# Altium PCB drv8303_brd.PcbDoc
Units mm, origin at the board's own origin, x right, y up, seen from the top; angles counter-clockwise.
Board outline 60 x 68 mm, 2 copper layers (Top Layer, Bottom Layer); 83 components, 66 nets, 348 pads, 194 vias.
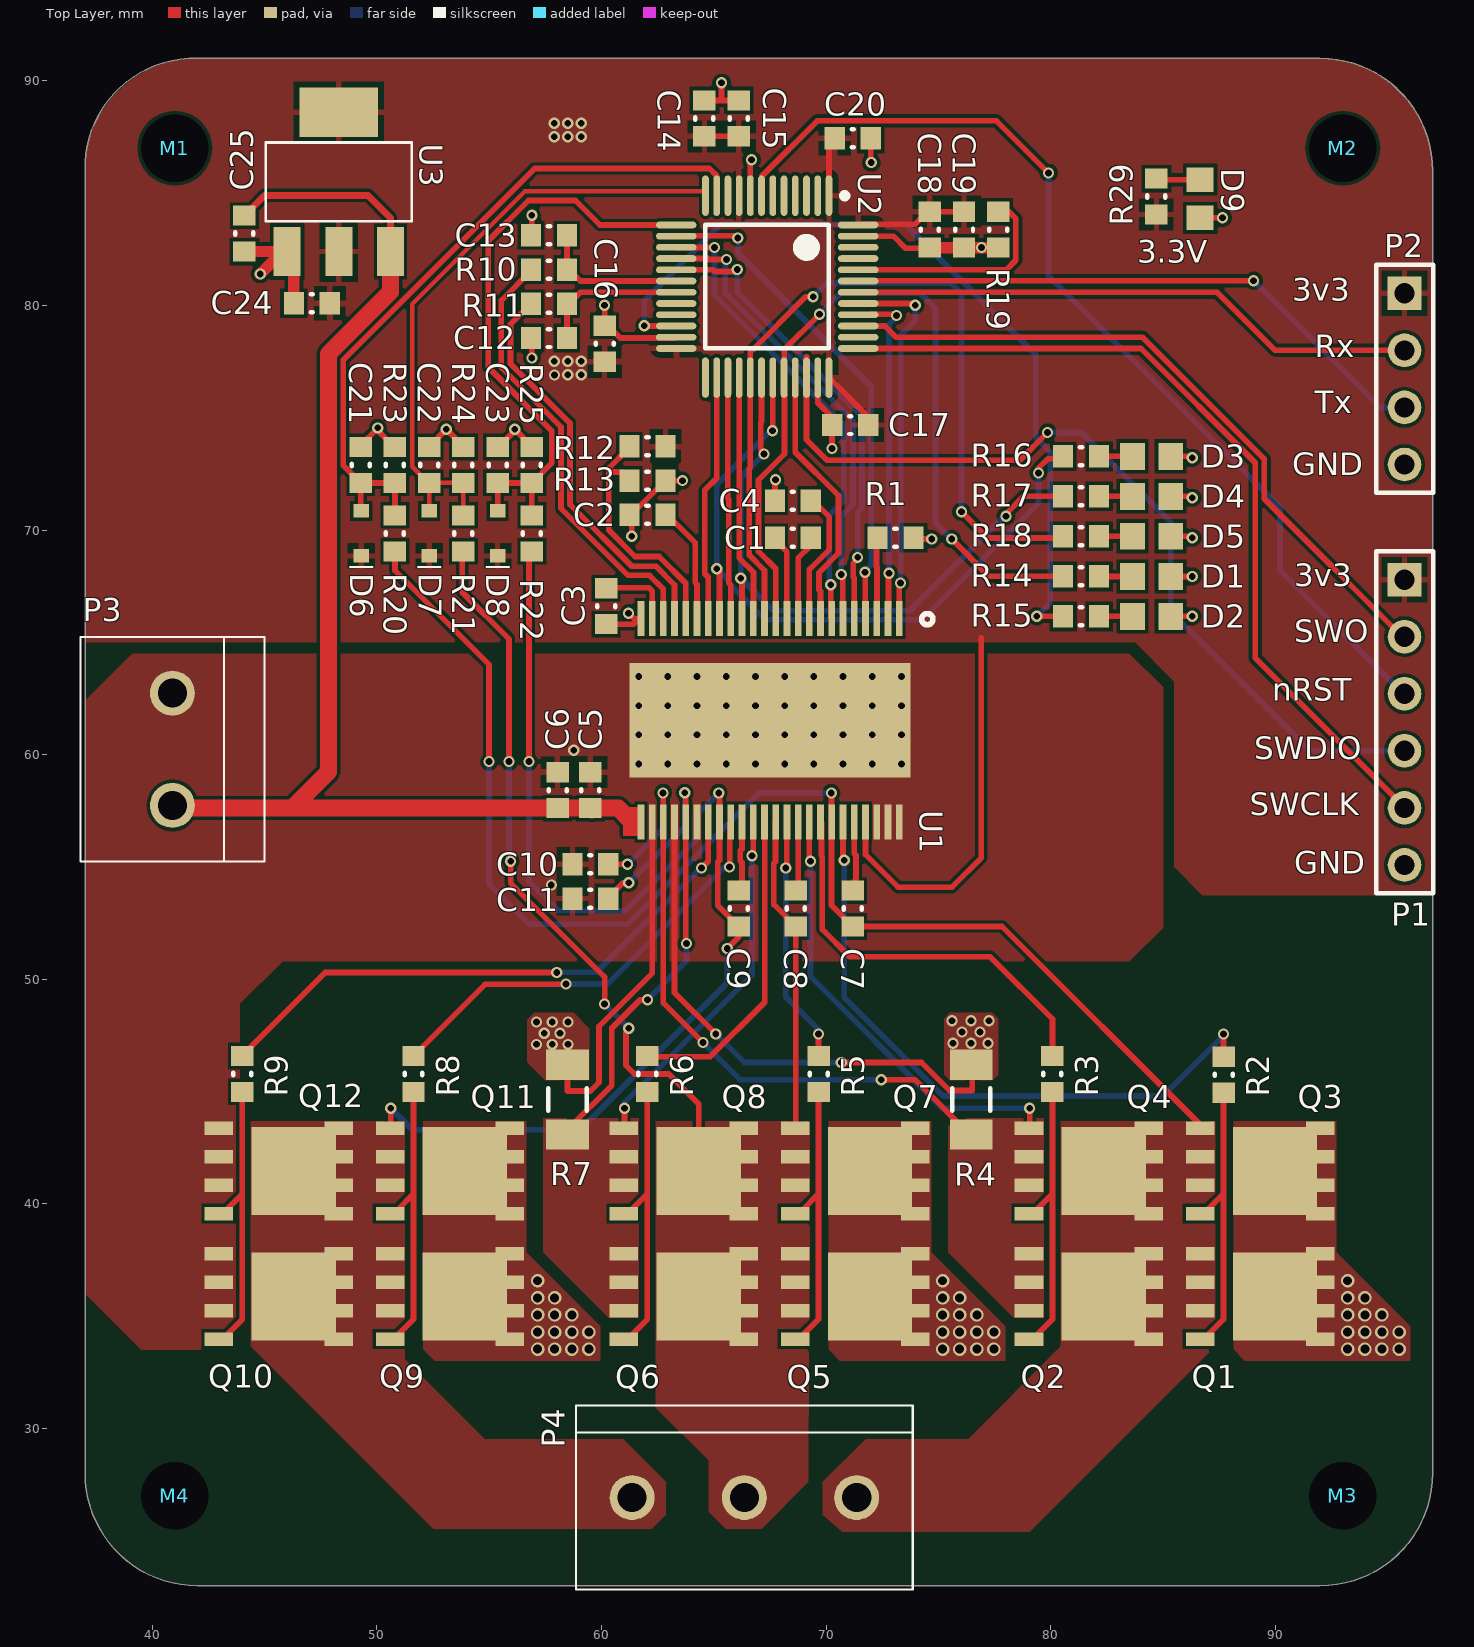
[diagram p0: Top Layer view]
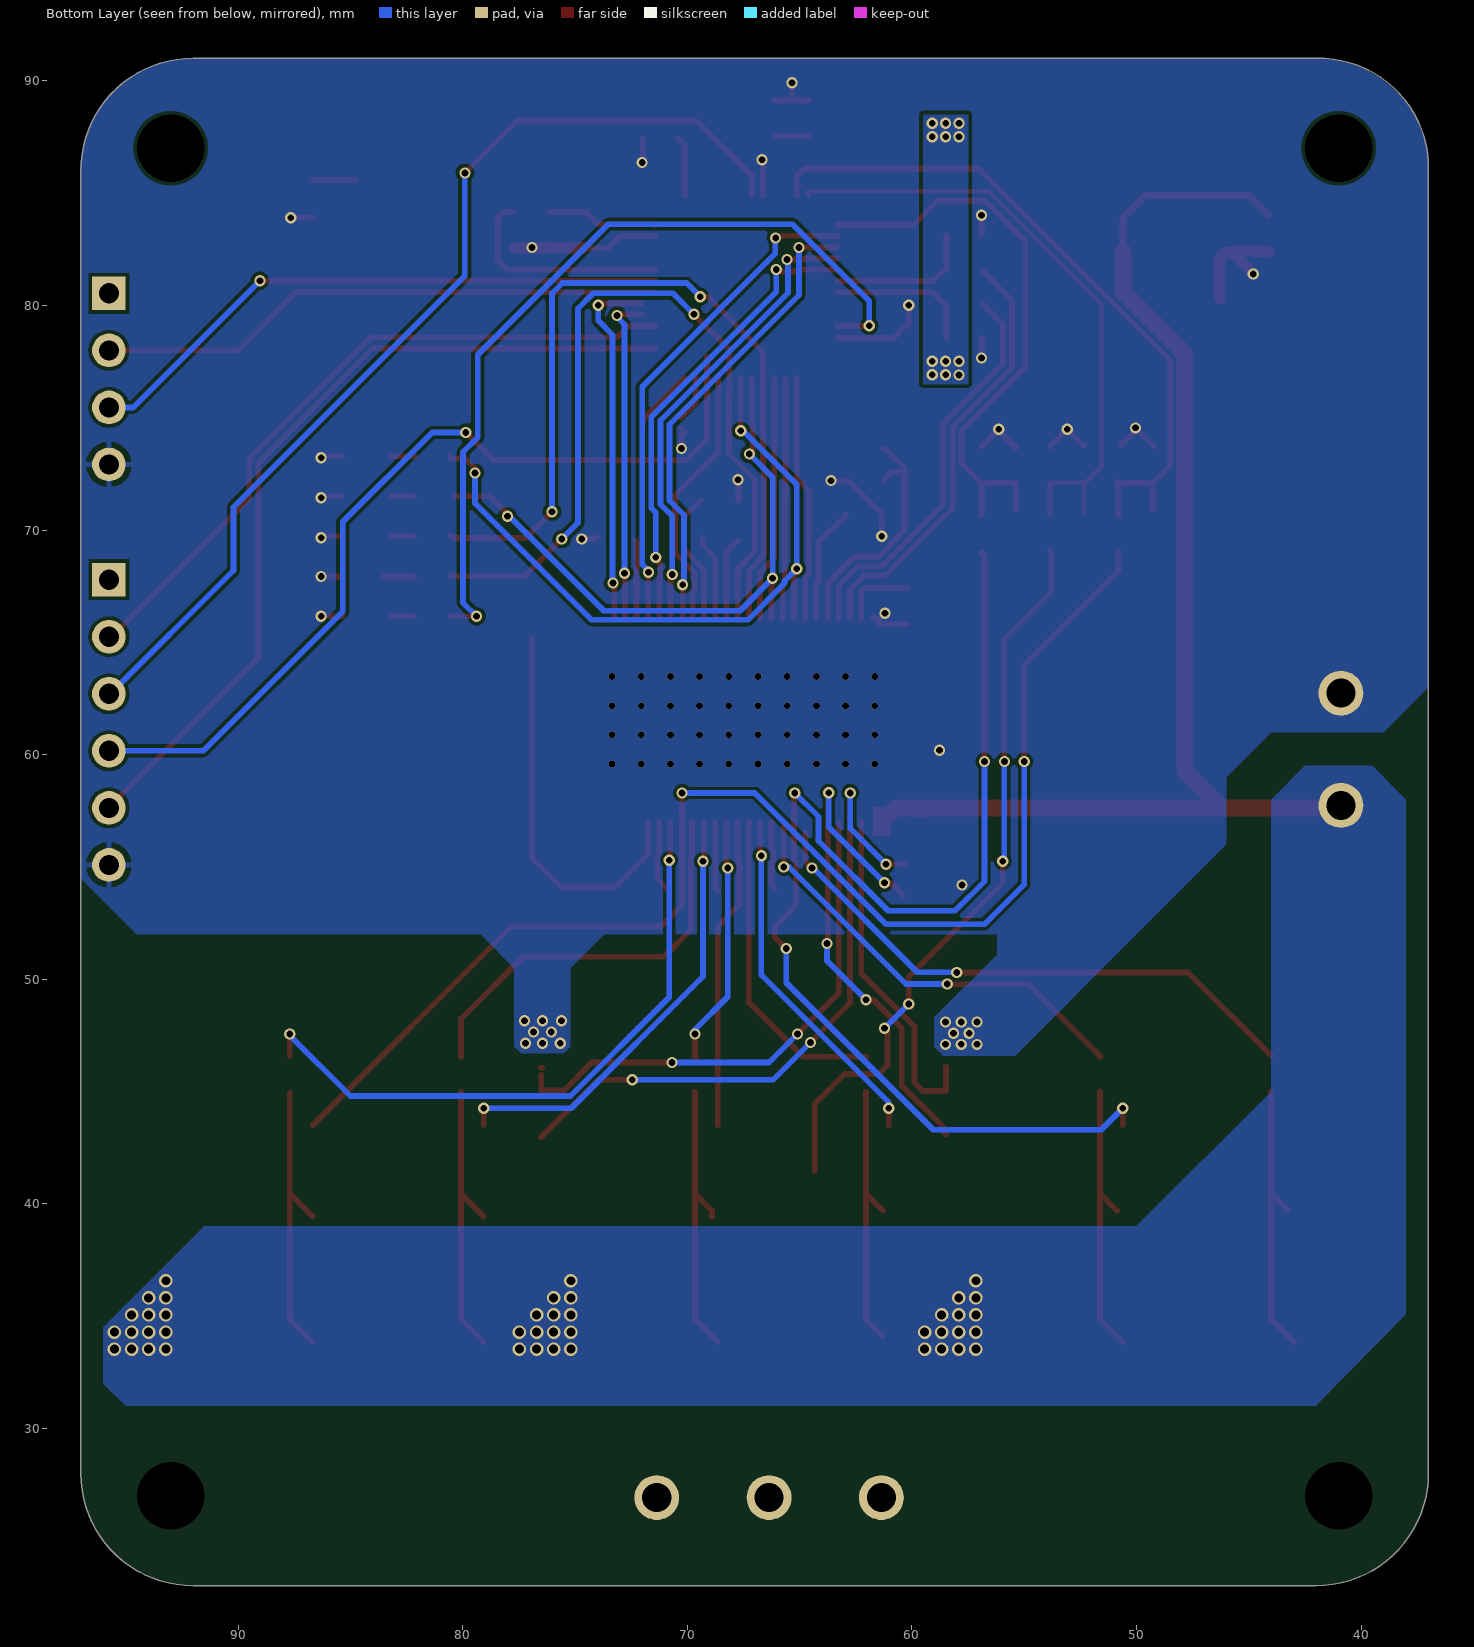
[diagram p1: Bottom Layer view, seen from below]

## Layer stack, top to bottom
Top Solder: solder mask 0.0102, Solder Resist, Dk 3.5
Top Layer: signal copper 0.0356
Dielectric 1: dielectric 0.32, FR-4, Dk 4.8
Bottom Layer: signal copper 0.0356
Bottom Solder: solder mask 0.0102, Solder Resist, Dk 3.5

## Board outline
37,86 cw(c41.867,86.133) 42,91 92,91 cw(c92,86) 97,86 97,28 cw(c92,28) 92,23 42,23 cw(c42.006,28.006) 37,28

## Design rules (kind name [scope] priority, off if disabled: settings)
Clearance [All] p1: gap=0.152 ignorepadtopadclearanceinfootprint=FALSE
ComponentClearance [All] p1: gap=0.127 collisioncheckmode=3 verticalgap=0.254 showdistances=FALSE
HoleSize [All] p1: absolutevalues=TRUE maxlimit=10 minlimit=0.3 maxpercent=80.000 minpercent=20.000
HoleToHoleClearance [All] p1: gap=0.127 allowstackedmicrovias=TRUE
MinimumSolderMaskSliver [All] p1: minsoldermaskwidth=0.089
PolygonConnect PolygonConnect_1power [InComponentClass('pour_over') or (IsVia and (InNet('VBUS') or InNet('GND')))] p1: connectstyle=Direct reliefconductorwidth=0.254 reliefentries=4 polygonreliefangle="90 Angle" airgapwidth=0.254
PolygonConnect PolygonConnect_3V3 [InNet('3v3')] p2: thpad.connectstyle=Relief thpad.reliefconductorwidth=0.254 thpad.reliefentries=4 thpad.polygonreliefangle="90 Angle" thpad.airgapwidth=0.254 smdpad.connectstyle=Relief smdpad.reliefconductorwidth=0.254 smdpad.reliefentries=4 smdpad.polygonreliefangle="90 Angle" smdpad.airgapwidth=0.254 via.connectstyle=Direct via.reliefconductorwidth=0.254 via.reliefentries=4 via.polygonreliefangle="90 Angle" via.airgapwidth=0.254
PolygonConnect PolygonConnect_drv [InComponent('U1')  and InNet('GND')] p3: thpad.connectstyle=Relief thpad.reliefconductorwidth=0.254 thpad.reliefentries=4 thpad.polygonreliefangle="90 Angle" thpad.airgapwidth=0.254 smdpad.connectstyle=Direct smdpad.reliefconductorwidth=0.254 smdpad.reliefentries=4 smdpad.polygonreliefangle="90 Angle" smdpad.airgapwidth=0.254 via.connectstyle=Direct via.reliefconductorwidth=0.254 via.reliefentries=4 via.polygonreliefangle="90 Angle" via.airgapwidth=0.254
PolygonConnect [All] p4: connectstyle=Relief reliefconductorwidth=0.254 reliefentries=4 polygonreliefangle="90 Angle" airgapwidth=0.254
RoutingVias [All] p1: holewidth=0.3 width=0.5 viastyle="Through Hole" minholewidth=0.127 minwidth=0.127 maxholewidth=0.711 maxwidth=1.27
SilkToSilkClearance [All] p1: silktosilkclearance=0.127
SilkToSolderMaskClearance [IsPad] p1: minsilkscreentomaskgap=0.127 clearancetoexposedcopper=TRUE
SolderMaskExpansion [All] p1: expansion=0.102
Width [All] p1: maxlimit=2.54 minlimit=0.152 preferedwidth=0.254
24 further rules are at their usual default settings.

## Classes and differential pairs
component class TopLevel: * M1 M2 M3 M4
component class pour_over: P3 P4 Q1 Q2 Q3 Q4 Q5 Q6 Q7 Q8 Q9 Q10 Q11 Q12 R4 R7
component class Power: C24 C25 D9 P3 R29 U3
component class STM32: C14 C15 C16 C17 C18 C19 C20 D1 D2 D3 D4 D5 P1 P2 R14 R15 R16 R17 R18 R19 U2
component class "Gate Driver": C1 C2 C3 C4 C5 C6 C7 C8 C9 C10 C11 C12 C13 C21 C22 C23 D6 D7 D8 P4 Q1 Q2 Q3 Q4 Q5 Q6 Q7 Q8 Q9 Q10 Q11 Q12 R1 R2 R3 R4 R5 R6 R7 R8 R9 R10 R11 R12 R13 R20 R21 R22 R23 R24 R25 U1

## Components (designator, comment, footprint, x,y, rotation, side; value= is the part's Value field where it differs from the comment)
C1 "0.022uF" RESC0603(1608)_N 68.516,69.659 r0 top
C2 "1uF" RESC0603(1608)_N 62.039,70.675 r0 top
C3 "1uF" RESC0603(1608)_N 60.198,66.611 r90 top
C4 "2.2uF" RESC0603(1608)_N 68.516,71.31 r0 top
C5 "4.7uF" RESC0603(1608)_N 59.499,58.42 r90 top
C6 "0.1uF" RESC0603(1608)_N 58.039,58.42 r90 top
C7 "0.1uF" RESC0603(1608)_N 71.183,53.149 r270 top
C8 "0.1uF" RESC0603(1608)_N 68.644,53.149 r270 top
C9 "0.1uF" RESC0603(1608)_N 66.103,53.149 r270 top
C10 "0.1uF" RESC0603(1608)_N 59.499,55.118 r180 top
C11 "0.1uF" RESC0603(1608)_N 59.499,53.594 r180 top
C12 "2200pF" RESC0603(1608)_N 57.658,78.549 r180 top
C13 "2200pF" RESC0603(1608)_N 57.658,83.121 r180 top
C14 "100nF" RESC0603(1608)_N 64.579,88.328 r270 top
C15 "1uF" RESC0603(1608)_N 66.103,88.328 r270 top
C16 "100nF" RESC0603(1608)_N 60.134,78.295 r270 top
C17 "100nF" RESC0603(1608)_N 71.069,74.676 r0 top
C18 "100nF" RESC0603(1608)_N 74.612,83.376 r90 top
C19 "10uF" RESC0603(1608)_N 76.136,83.376 r90 top
C20 "100nF" RESC0603(1608)_N 71.183,87.439 r180 top
C21 "0.1uF" RESC0603(1608)_N 49.276,72.898 r90 top
C22 "0.1uF" RESC0603(1608)_N 52.324,72.898 r90 top
C23 "0.1uF" RESC0603(1608)_N 55.372,72.898 r90 top
C24 "1uF" RESC0603(1608)_N 47.1,80.1 r180 top
C25 "1uF" RESC0603(1608)_N 44.1,83.2 r270 top
D1 "LED" 0603 84.485,67.935 r180 top
D2 "LED" 0603 84.485,66.157 r180 top
D3 "LED" 0603 84.485,73.279 r180 top
D4 "LED" 0603 84.485,71.501 r180 top
D5 "LED" 0603 84.485,69.723 r180 top
D6 "Diode_schottky" SOD523 49.3,69.85 r90 top
D7 "Diode_schottky" SOD523 52.324,69.85 r90 top
D8 "Diode_schottky" SOD523 55.372,69.85 r90 top
D9 "LED" 0603 86.65,84.75 r90 top
M1 "Mounting_hole" M3_drill 41,87 r90 top
M2 "Mounting_hole" M3_drill 93,87 r90 top
M3 "Mounting_hole" M3_drill 93,27 r90 top
M4 "Mounting_hole" M3_drill 41,27 r0 top
P1 "Header 6" HDR1X6 95.75,67.79 r270 top
P2 "Header 4" HDR1X4 95.75,80.54 r270 top
P3 "ScrewTerm_2" ScrewTerm_2 40.894,62.738 r0 top
P4 "ScrewTerm_3" ScrewTerm_3 61.357,26.924 r90 top
Q1 "FDMS7682" PQFN8_5x6 89.319,35.877 r270 top
Q2 "FDMS7682" PQFN8_5x6 81.699,35.877 r270 top
Q3 "FDMS7682" PQFN8_5x6 89.319,41.465 r270 top
Q4 "FDMS7682" PQFN8_5x6 81.699,41.465 r270 top
Q5 "FDMS7682" PQFN8_5x6 71.285,35.877 r270 top
Q6 "FDMS7682" PQFN8_5x6 63.665,35.877 r270 top
Q7 "FDMS7682" PQFN8_5x6 71.285,41.465 r270 top
Q8 "FDMS7682" PQFN8_5x6 63.665,41.465 r270 top
Q9 "FDMS7682" PQFN8_5x6 53.251,35.877 r270 top
Q10 "FDMS7682" PQFN8_5x6 45.631,35.877 r270 top
Q11 "FDMS7682" PQFN8_5x6 53.251,41.465 r270 top
Q12 "FDMS7682" PQFN8_5x6 45.631,41.465 r270 top
R1 "0R" RESC0603(1608)_N 73.088,69.659 r180 top
R2 "10R" RESC0603(1608)_N 87.694,45.746 r270 top
R3 "10R" RESC0603(1608)_N 80.073,45.783 r270 top
R4 "0.01R" RESC1206(3216)_M 76.454,44.64 r90 top
R5 "10R" RESC0603(1608)_N 69.659,45.783 r270 top
R6 "10R" RESC0603(1608)_N 62.039,45.783 r270 top
R7 "0.01R" RESC1206(3216)_M 58.483,44.64 r90 top
R8 "10R" RESC0603(1608)_N 51.625,45.783 r270 top
R9 "10R" RESC0603(1608)_N 44.005,45.783 r270 top
R10 "56R" RESC0603(1608)_N 57.658,81.597 r180 top
R11 "56R" RESC0603(1608)_N 57.658,80.073 r180 top
R12 "10KR" RESC0603(1608)_N 62.039,73.724 r0 top
R13 "10KR" RESC0603(1608)_N 62.039,72.2 r180 top
R14 "1KR" RESC0603(1608)_N 81.348,67.935 r0 top
R15 "1KR" RESC0603(1608)_N 81.348,66.157 r0 top
R16 "1KR" RESC0603(1608)_N 81.348,73.279 r0 top
R17 "1KR" RESC0603(1608)_N 81.348,71.501 r0 top
R18 "1KR" RESC0603(1608)_N 81.348,69.723 r0 top
R19 "1KR" RESC0603(1608)_N 77.66,83.376 r270 top
R20 "68KR" RESC0603(1608)_N 50.8,69.85 r270 top
R21 "68KR" RESC0603(1608)_N 53.848,69.85 r270 top
R22 "68KR" RESC0603(1608)_N 56.896,69.85 r270 top
R23 "10KR" RESC0603(1608)_N 50.8,72.898 r270 top
R24 "10KR" RESC0603(1608)_N 53.848,72.898 r270 top
R25 "10KR" RESC0603(1608)_N 56.896,72.898 r270 top
R29 "1KR" RESC0603(1608)_N 84.7,84.85 r90 top
U1 "DRV8303" HSSOP48 67.501,61.531 r180 top
U2 "STM32F103C8T6" STM-LQFP48_N 67.373,80.835 r270 top
U3 "AZ1117EH" SOT-223 48.3,85.5 r0 top

## Footprints (in the part's own frame and the unit in brackets; to place one, negate y for a bottom-side part, rotate by r counter-clockwise, add the part's x,y. Pads: shape width x height; smd on the part's side, far side on the other; paste and mask are expansions set on the pad)
0603 [mm]
  rect 1.1x1.2 smd: 1(-0.85,0) 2(0.85,0)
HDR1X4 [mm] "Connector; Header; 4 Position"
  rect 1.5x1.5 hole 0.9: 1(0,0)
  round 1.5 hole 0.9: 2(2.54,0) 3(5.08,0) 4(7.62,0)
  silkscreen extent -1.27,-1.27 8.89,1.27
HDR1X6 [mm] "Connector; Header; 6 Position"
  rect 1.5x1.5 hole 0.9: 1(0,0)
  round 1.5 hole 0.9: 2(2.54,0) 3(5.08,0) 4(7.62,0) 5(10.16,0) 6(12.7,0)
  silkscreen extent -1.27,-1.27 13.97,1.27
HSSOP48 [mm]
  rect 12.5x5.1 smd mask+0: 0(0,0)
  rect 0.3x1.55 smd: 1(-5.75,-4.525) 2(-5.25,-4.525) 3(-4.75,-4.525) 4(-4.25,-4.525) 5(-3.75,-4.525) 6(-3.25,-4.525) 7(-2.75,-4.525) 8(-2.25,-4.525) 9(-1.75,-4.525) 10(-1.25,-4.525) 11(-0.75,-4.525) 12(-0.25,-4.525) 13(0.25,-4.525) 14(0.75,-4.525) 15(1.25,-4.525) 16(1.75,-4.525) 17(2.25,-4.525) 18(2.75,-4.525) 19(3.25,-4.525) 20(3.75,-4.525) 21(4.25,-4.525) 22(4.75,-4.525) 23(5.25,-4.525) 24(5.75,-4.525) 25(5.75,4.525) 26(5.25,4.525) 27(4.75,4.525) 28(4.25,4.525) 29(3.75,4.525) 30(3.25,4.525) 31(2.75,4.525) 32(2.25,4.525) 33(1.75,4.525) 34(1.25,4.525) 35(0.75,4.525) 36(0.25,4.525) 37(-0.25,4.525) 38(-0.75,4.525) 39(-1.25,4.525) 40(-1.75,4.525) 41(-2.25,4.525) 42(-2.75,4.525) 43(-3.25,4.525) 44(-3.75,4.525) 45(-4.25,4.525) 46(-4.75,4.525) 47(-5.25,4.525) 48(-5.75,4.525)
  silkscreen extent -7.25,-4.75 -6.75,-4.25, body extent -6.3,-3.1 6.3,3.1, height 1.2
M3_drill [mm]
  round 1 hole 3 unplated mask+0.5: ""(0,0)
PQFN8_5x6 [mm]
  rect 3.91x3.75 smd: 0(0,0.66)
  rect 0.61x1.27 smd: 1(-1.905,-2.67) 2(-0.635,-2.67) 3(0.635,-2.67) 4(1.905,-2.67) 5(1.905,2.67) 6(0.635,2.67) 7(-0.635,2.67) 8(-1.905,2.67)
  body extent -2.55,-3.1 2.55,3.1, height 1.1
RESC0603(1608)_N [mm] "Chip Resistor, Body 1.6x0.8mm, IPC Medium Density"
  rect 0.9x1 smd: 1(-0.8,0) 2(0.8,0)
  silkscreen extent -0.05,-0.4 0.05,0.4, body extent -0.85,-0.47 0.85,0.47, height 0.6
RESC1206(3216)_M [mm] "Chip Resistor, Body 3.2x1.6mm, IPC Low Density"
  rect 1.35x1.9 smd: 1(-1.55,0) 2(1.55,0)
  silkscreen extent -0.5,-0.85 0.5,0.85, body extent -1.67,-0.87 1.67,0.87, height 0.75
ScrewTerm_2 [mm]
  round 2 hole 1.3: 1(0,0) 2(0,-5)
  silkscreen extent -4.1,-7.5 4.1,2.5
ScrewTerm_3 [mm]
  round 2 hole 1.3: 1(0,0) 2(0,-5) 3(0,-10)
  silkscreen extent -4.1,-12.5 4.1,2.5
SOD523 [mm]
  rect 0.6x0.7 smd: 1(-1,0) 2(1,0)
  silkscreen extent -1.5,-0.5 -1.5,0.5, body extent -0.65,-0.45 0.65,0.45, height 0.65
SOT-223 [mm]
  rect 1.2x2.2 smd: 1(-2.3,-3.1) 2(0,-3.1) 3(2.3,-3.1)
  rect 3.5x2.2 smd: 2(0,3.1)
  silkscreen extent -3.25,-1.75 3.25,1.75, body extent -3.35,-1.85 3.35,1.85, height 1.1
STM-LQFP48_N [mm] "QFP, 48-Leads, Body 7x7mm, Pitch 0.5mm, IPC Medium Density"
  oval 1.8x0.3 smd: 1(-4.05,2.75) 2(-4.05,2.25) 3(-4.05,1.75) 4(-4.05,1.25) 5(-4.05,0.75) 6(-4.05,0.25) 7(-4.05,-0.25) 8(-4.05,-0.75) 9(-4.05,-1.25) 10(-4.05,-1.75) 11(-4.05,-2.25) 12(-4.05,-2.75) 25(4.05,-2.75) 26(4.05,-2.25) 27(4.05,-1.75) 28(4.05,-1.25) 29(4.05,-0.75) 30(4.05,-0.25) 31(4.05,0.25) 32(4.05,0.75) 33(4.05,1.25) 34(4.05,1.75) 35(4.05,2.25) 36(4.05,2.75)
  oval 0.3x1.8 smd: 13(-2.75,-4.05) 14(-2.25,-4.05) 15(-1.75,-4.05) 16(-1.25,-4.05) 17(-0.75,-4.05) 18(-0.25,-4.05) 19(0.25,-4.05) 20(0.75,-4.05) 21(1.25,-4.05) 22(1.75,-4.05) 23(2.25,-4.05) 24(2.75,-4.05) 37(2.75,4.05) 38(2.25,4.05) 39(1.75,4.05) 40(1.25,4.05) 41(0.75,4.05) 42(0.25,4.05) 43(-0.25,4.05) 44(-0.75,4.05) 45(-1.25,4.05) 46(-1.75,4.05) 47(-2.25,4.05) 48(-2.75,4.05)
  silkscreen extent -4.17,-2.75 2.75,3.58, body extent -3.5,-3.5 3.5,3.5, height 1.6

## Part data
C1 C2 C3 C4 C5 C6 C7 C8 C9 C10 C11 C12 C13 C14 C15 C16 C17 C18 C19 C20 C21 C22 C23 C24 C25: library part Capacitor, "Non polarized capacitor", Mounting Technology="Surface Mount"
P1: "Header, 6-Pin", LatestRevisionDate=17-Jul-2002, LatestRevisionNote="Re-released for DXP Platform.", Publisher="Altium Limited"
P2: "Header, 4-Pin", LatestRevisionDate=17-Jul-2002, LatestRevisionNote="Re-released for DXP Platform.", Publisher="Altium Limited"
R1 R2 R3 R4 R5 R6 R7 R8 R9 R10 R11 R12 R13 R14 R15 R16 R17 R18 R19 R20 R21 R22 R23 R24 R25 R29: library part Resistor, "Resistor", ComponentLink1Description="Land patterns", ComponentLink1URL=https://www.vishay.com/docs/60119/landpatterns.pdf, ComponentLink2Description="1k digikey", ComponentLink2URL=https://www.digikey.com.au/product-detail/en/yageo/RC0603JR-071KL/311-1.0KGRCT-ND/729624, ComponentLink3Description="shunt digikey", ComponentLink3URL=https://www.digikey.com.au/product-detail/en/yageo/PF1206FRF070R02L/311-0.02AJCT-ND/2178365, Mounting Technology="Surface Mount"
  R4 R7: ClassName=pour_over
U2: "ARM Cortex-M3 32-bit MCU, 64 KB Flash, 20 KB Internal RAM, 37 I/Os, 48-pin LQFP, -40 to 85 degC, Tray", I/Os (High Current)=37, Operating Frequency(F) (Processor speed) (MHz)=72, Supplier Part Number 1=497-6063-ND, Supply Voltage(Vcc) min (V)=2, A/D Converter="2x12-bit (10 Channel)", ComponentLink1Description="Manufacturer URL", ComponentLink1URL=http://www.st.com/web/en/home.html, ComponentLink2Description=Datasheet, ComponentLink2URL=http://www.st.com/st-web-ui/static/active/en/resource/technical/document/datasheet/CD00161566.pdf, ComponentLink3Description="Package Specification", ComponentLink3URL=http://www.st.com/st-web-ui/static/active/en/resource/technical/document/datasheet/DM00058181.pdf, Core="ARM Cortex-M3", DatasheetVersion="Rev. 16", FLASH Size (Prog) (kB)=64, Internal RAM Size (kB)=20, Mounting Technology="Surface Mount", PackageDescription="48-Pin Low Profile Quad Flat Package, 7 x 7 mm Body, 0.5 mm Pitch", PackageReference=LQFP48, PackageVersion="Rev. 6, 06/2013", Packing=Tray, PartNumber=STM32F103C8T6, Supplier 1=Digi-Key, Supplier 2=Farnell, Supplier 3=Newark, Supplier 4=Newark, Supplier 5=Mouser, Supplier Part Number 2=1447637, Supplier Part Number 3=59M2182, Supplier Part Number 4=57P1222, Supplier Part Number 5=511-STM32F103C8T6
U3: Digikey Part Number=AZ1117EH-3.3TRG1DICT-ND, Manufacturer="Diodes Incorporated", PartNumber=AZ1117EH-3.3TRG1, ComponentLink1Description=Datasheet, ComponentLink1URL=https://www.diodes.com/assets/Datasheets/AZ1117E.pdf, Mounting Technology="Surface Mount"
D1 D2 D3 D4 D5 D9: Mounting Technology="Surface Mount"
P3 P4 Q1 Q2 Q3 Q4 Q5 Q6 Q7 Q8 Q9 Q10 Q11 Q12: ClassName=pour_over

## Via types
v1: diameter 0.5, hole 0.3, Top Layer to Bottom Layer, tented both sides, 112 vias
v2: diameter 0.6, hole 0.4, Top Layer to Bottom Layer, tented both sides, 42 vias
v3: diameter 0.3, hole 0.3, Top Layer to Bottom Layer, 40 vias

## Nets (pads, with @x,y where several pads share a name; then routed paths per layer and width w, separated by ;. In a path a pad name is that pad's centre, name@x,y a point inside that pad or via, vN(x,y) a via of type N, cw(c..) or ccw(c..) an arc to the next point about the centre after c; other vN are vias at no path point)
3v3: C14.2 C15.2 C16.2 C17.2 C18.2 C19.2 C20.2 C24.1 D6.1 D7.1 D8.1 P1.1 P2.1 R12.2 R29.1 U1.45 U2.1 U2.9 U2.24 U2.36 U2.48 U3.2 | length 29.2
  Top Layer w0.254: C14.2 C15.2@65.951,87.528 ; C15.2@66.103,87.566 C15.2@66.123,87.547 ; U2.36 71.958,74.951 C17.2@71.958,74.752 ; U2.1 70.123,87.141 C20.2@70.421,87.439 ; U2.48 71.451,83.613 73.961,83.613 C18.2@74.486,84.138 ; U1.45 71.751,55.549 73.2,54.1 75.6,54.1 76.9,55.4 76.9,65.202 ; C18.2@74.612,84.138 74.651,84.176 C19.2
  other v1: 57.9,76.9 58.496,76.911 59.096,76.911 57.896,77.511 58.496,77.511 59.096,77.511 57.896,87.511 58.496,87.511 59.096,87.511 57.896,88.11 58.496,88.11 59.096,88.11
BOOT1: U2.20
EN_GATE: R14.1 U1.12 U2.32 | length 37.1
  Top Layer w0.254: U1.12 67.751,68.28 66.987,69.044 66.987,72.232 68.144,73.389 68.144,76.002 68.123,76.023 U2.32 68.132,76.794 68.132,78.038 v1(69.698,79.604) ; v1(75.59,69.596) 77.241,67.945 80.457,67.945 80.522,68.01 R14.1@80.522,67.935
  Bottom Layer w0.254: v1(69.698,79.604) 70.633,80.539 74.184,80.539 74.864,79.86 74.864,70.323 v1(75.59,69.596)
GH_A: R2.1 U1.43 | length 28.6
  Top Layer w0.254: v1@70.675,55.308 70.751,55.384 U1.43 ; v1(87.694,47.561) 87.694,46.607 R2.1@87.7,46.6
  Bottom Layer w0.254: v1(70.8,55.3) 70.8,49.2 75.2,44.8 85,44.8 v1@87.7,47.5
GH_B: R5.1 U1.38 | length 11.3
  Top Layer w0.254: v1@68.15,54.95 68.251,55.051 U1.38 ; v1(68.2,54.95) v1@68.25,55 ; R5.1@69.596,46.482 69.659,46.545 R5.1 v1(69.659,47.561)
  Bottom Layer w0.254: v1(68.2,54.95) 68.2,49.222 69.659,47.763 v1(69.659,47.561)
GH_C: R8.1 U1.33 | length 19.6
  Top Layer w0.254: R8.1@51.625,46.545 R8.1 54.813,49.771 58.407,49.771 v1(58.42,49.784) ; v1(65.7,55) 65.7,56.956 U1.33
  Bottom Layer w0.254: v1(58.42,49.784) 60.258,49.784 65.474,55 v1(65.7,55)
GL_A: R3.1 U1.41 | length 18.4
  Top Layer w0.254: U1.41 69.789,56.968 69.789,55.51 69.829,55.469 69.829,52.218 71.047,51 77.3,51 80.073,48.226 R3.1 R3.1@80.073,46.545
GL_B: R6.1 U1.36 | length 14.3
  Top Layer w0.254: R6.1@62.039,46.545 64.834,46.545 67.263,48.975 67.263,56.994 U1.36
GL_C: R9.1 U1.31 | length 25.6
  Top Layer w0.254: R9.1@44,46.6 47.7,50.3 v1(58,50.3) ; v1(64.45,54.95) 64.75,55.25 U1.31@64.75,56.55
  Bottom Layer w0.254: v1(58,50.3) 58.013,50.313 59.763,50.313 64.4,54.95 v1(64.45,54.95)
GND: C2.1 C3.1 C4.1 C5.2 C6.2 C10.2 C11.2 C12.2 C13.2 C14.1 C15.1 C16.1 C17.1 C18.1 C19.1 C20.1 C21.2 C22.2 C23.2 C24.2 C25.2 D1.1 D2.1 D3.1 D4.1 D5.1 D9.1 P1.6 P2.4 P3.1 Q10.1 Q10.2 Q10.3 Q12.1 Q12.2 Q12.3 R1.1 R4.2 R7.2 R13.1 R19.2 R23.1 R24.1 R25.1 U1.0 U1.24 U1.26 U1.28 U1.30 U1.46 U1.47 U1.48 U2.8 U2.23 U2.35 U2.47 U3.1 | length 83.9
  Top Layer w0.25: D9.1 v1(87.65,83.9)
  Top Layer w0.254: C21.2@49.212,73.724 v1(50.038,74.549) 50.038,74.422 R23.1@50.673,73.787 ; C22.2@52.324,73.787 52.387,73.787 v1(53.086,74.486) R24.1@53.848,73.724 ; C23.2@55.372,73.66 56.134,74.422 v1(56.134,74.486) R25.1@56.896,73.724 ; C12.2@56.832,78.549 56.896,78.486 v1(56.896,77.66) ; C13.2@56.896,83.121 v1(56.896,84.01) ; R7.2@58.483,46.089 58.483,45.021 59.499,45.021 59.88,45.402 59.88,47.892 62.251,50.262 U1.26 ; C16.1@60.134,79.121 v1(60.134,80.01) ; C3.1 61.43,65.811 U1.24@61.675,66.056 ; C16.1@60.325,79.057 60.829,78.554 63.292,78.554 U2.23 ; v1@61.25,66.25 61.443,66.056 U1.24@61.675,66.056 ; v1(61.341,69.723) C2.1@61.341,70.612 ; C2.1@61.341,70.739 61.379,70.739 R13.1 ; U1.24@61.722,66.103 U1.24@61.675,66.056 ; U1.24 U1.24@61.675,66.056 ; R13.1@63,72.2 v1(63.6,72.2) ; U1.28@63.25,57.006 63.25,49.399 v1(65.087,47.561) ; C14.1 66.078,89.128 C15.1@66.103,89.154 ; 65.341,89.154 v1(65.341,89.916) ; U2.8 66.623,86.372 v1@66.675,86.423 ; C4.1 67.717,72.212 v1(67.742,72.238) ; U2.35 69.624,75.664 C17.1@70.282,75.006 ; v1(70.256,73.635) 70.256,74.219 70.104,74.371 C17.1@70.282,74.549 ; v1(70.675,46.291) 74.25,46.291 75.492,45.05 76.5,45.05 R4.2@76.5,45.75 ; U2.47 72.997,83.086 73.533,82.55 C18.1@74.625,82.55 ; C20.1 71.983,86.449 v1@72.009,86.423 ; R1.1@74,69.7 74.1,69.6 v1(74.7,69.6) ; R4.2@76.454,46.063 R4.2@76.517,46.063 ; D2.1 86.237,66.157 v1@86.301,66.094 ; D1.1 v1@86.174,67.935 ; D5.1 86.301,69.723 v1@86.364,69.659 ; D4.1 86.174,71.501 v1@86.237,71.438 ; D3.1 86.174,73.279 v1@86.237,73.215
  Top Layer w0.508: C25.2 45.7,82.4 U3.1@45.8,82.3 ; v1(44.8,81.4) U3.1@45.6,82.2 ; U3.1 46.3,82.1 C24.2@46.3,80.3 ; C18.1 76.124,82.576 C19.1@76.149,82.601 ; C19.1 R19.2@77.673,82.576
  Bottom Layer w0.254: v1(65.087,47.561) 66.358,46.291 v1(70.675,46.291)
  other v1: 57.1,47.1 57.8,47.1 58.5,47.1 75.65,47.15 76.45,47.15 77.2,47.15 57.45,47.6 58.15,47.6 76.05,47.65 76.85,47.65 57.1,48.1 57.8,48.1 58.5,48.1 75.6,48.15 76.45,48.15 77.25,48.15 57.764,54.193 58.764,60.193 86.301,66.157 61.2,66.3 86.301,67.935 86.301,69.659 86.301,71.438 86.301,73.215 76.911,82.575 72.009,86.36 66.675,86.487
  other v3: 61.65,59.581 62.95,59.581 64.25,59.581 65.55,59.581 66.85,59.581 68.151,59.581 69.451,59.581 70.751,59.581 72.051,59.581 73.351,59.581 61.65,60.881 62.95,60.881 64.25,60.881 65.55,60.881 66.85,60.881 68.151,60.881 69.451,60.881 70.751,60.881 72.051,60.881 73.351,60.881 61.65,62.182 62.95,62.182 64.25,62.182 65.55,62.182 66.85,62.182 68.151,62.182 69.451,62.182 70.751,62.182 72.051,62.182 73.351,62.182 61.65,63.482 62.95,63.482 64.25,63.482 65.55,63.482 66.85,63.482 68.151,63.482 69.451,63.482 70.751,63.482 72.051,63.482 73.351,63.482
LED_FAULT: R15.1 U2.22 | length 37.1
  Top Layer w0.254: v1(61.9,79.1) 61.915,79.085 U2.22 ; v1(79.379,66.157) R15.1@80.522,66.157
  Bottom Layer w0.254: v1(61.9,79.1) 61.9,80.2 65.313,83.613 73.518,83.613 79.328,77.803 79.328,74.127 79.981,73.474 79.981,66.758 79.389,66.167 v1@79.324,66.167
NetC1_1: C1.1 U1.11 | length 3.7
  Top Layer w0.254: C1.1@67.754,69.532 68.251,69.036 U1.11
NetC1_2: C1.2 U1.10 | length 3.8
  Top Layer w0.254: U1.10 68.751,68.751 69.317,69.317 C1.2
NetC2_2: C2.2 U1.19 | length 5.2
  Top Layer w0.254: C2.2@62.928,70.675 64.164,69.44 64.164,67.662 64.251,67.576 U1.19
NetC3_2: C3.2 U1.23 | length 3.3
  Top Layer w0.254: C3.2@60.198,67.437 61.151,67.437 62.103,67.437 62.251,67.289 U1.23
NetC4_2: C4.2 U1.9 | length 5.9
  Top Layer w0.254: U1.9 69.251,68.248 70.142,69.14 70.142,70.574 C4.2@69.406,71.31
NetC7_1: C7.1 U1.44 | length 3.2
  Top Layer w0.254: C7.1@70.929,54.038 71.329,54.438 71.329,55.519 71.251,55.598 U1.44
NetC8_1: C8.1 U1.39 | length 3.1
  Top Layer w0.254: C8.1@68.644,53.911 68.753,54.021 68.753,57.004 U1.39
NetC9_1: C9.1 U1.34 | length 3.1
  Top Layer w0.254: C9.1@66.103,54.038 66.253,54.188 66.253,55.195 66.17,55.278 66.17,55.719 66.253,55.802 66.253,57.004 U1.34
NetC12_1: C12.1 R11.1 U2.19 | length 6.5
  Top Layer w0.254: C12.1 58.458,79.984 R11.1@58.483,80.01 ; R11.1@58.547,80.073 59.059,80.586 U2.19
NetC13_1: C13.1 R10.1 U2.18 | length 6.4
  Top Layer w0.254: R10.1 58.458,83.096 C13.1@58.483,83.121 ; R10.1@58.61,81.534 59.059,81.085 U2.18
NetC21_1: C21.1 D6.2 R20.1 R23.2 U2.11 | length 31.2
  Top Layer w0.254: D6.2@49.3,70.9 49.276,70.9 C21.1 ; R23.2@50.787,72.085 50.774,72.098 C21.1 ; R20.1 50.8,72.072 R23.2@50.863,72.136 ; U2.11 65.123,85.777 64.8,86.1 57.025,86.1 48.497,77.571 48.497,72.877 C21.1
NetC22_1: C22.1 D7.2 R21.1 R24.2 U2.12 | length 27.9
  Top Layer w0.203: D7.2@52.3,70.8 52.324,70.824 52.324,72.074 C22.1@52.3,72.098 ; R21.1 R24.2 52.274,72.098 51.562,72.81 51.562,72.834 51.562,80.062 54.546,83.046 56.575,85.075 64.602,85.075 64.624,85.053 U2.12
NetC23_1: C23.1 D8.2 R22.1 R25.2 U2.13 | length 26
  Top Layer w0.254: D8.2@55.35,70.9 55.372,70.9 C23.1 56.807,72.098 R25.2@56.832,72.072 ; R22.1 R25.2@56.896,72.072 ; R25.2 57.785,72.987 57.785,74.415 54.953,77.247 54.953,82.878 56.743,84.668 58.842,84.668 59.925,83.585 U2.13
NetD1_2: D1.2 R14.2 | length 1.4
  Top Layer w0.254: R14.2 D1.2@83.507,67.935
NetD2_2: D2.2 R15.2 | length 1
  Top Layer w0.254: R15.2 D2.2@83.189,66.157
NetD3_2: D3.2 R16.2 | length 1
  Top Layer w0.254: R16.2 D3.2@83.189,73.279
NetD4_2: D4.2 R17.2 | length 1
  Top Layer w0.254: R17.2 D4.2@83.189,71.501
NetD5_2: D5.2 R18.2 | length 1
  Top Layer w0.254: R18.2 D5.2@83.189,69.723
NetD9_2: D9.2 R29.2 | length 1.9
  Top Layer w0.25: R29.2@84.75,85.6 D9.2
NetQ1_4: Q1.4 Q3.4 R2.2 | length 13
  Top Layer w0.254: Q1.4@86.677,33.846 87.694,34.861 87.694,40.45 ; Q3.4@86.677,39.433 87.694,40.45 ; R2.2 87.694,40.45
NetQ2_4: Q2.4 Q4.4 R3.2 | length 13
  Top Layer w0.254: Q2.4@79.057,33.846 80.073,34.861 80.073,40.45 ; Q4.4@79.057,39.433 80.073,40.45 ; R3.2 80.073,40.45
NetQ5_4: Q5.4 Q7.4 R5.2 | length 12.9
  Top Layer w0.254: Q5.4@68.644,33.846 69.659,34.861 69.659,40.45 ; Q7.4@68.897,39.433 68.897,39.688 69.659,40.45 ; R5.2 69.659,40.45
NetQ6_4: Q6.4 Q8.4 R6.2 | length 12.3
  Top Layer w0.254: Q6.4@61.277,34.099 62.039,34.861 62.039,40.45 ; Q8.4@61.277,39.688 62.039,40.45 ; R6.2 62.039,40.45
NetQ9_4: Q9.4 Q11.4 R8.2 | length 12.6
  Top Layer w0.254: Q9.4@50.609,33.846 51.625,34.861 51.625,40.45 ; Q11.4@50.863,39.688 51.625,40.45 ; R8.2 51.625,40.45
NetQ10_4: Q10.4 Q12.4 R9.2 | length 12.6
  Top Layer w0.254: Q10.4@42.989,33.846 44.005,34.861 44.005,40.45 ; Q12.4@43.243,39.688 44.005,40.45 ; R9.2 44.005,40.45
NetR1_2: R1.2 U1.3 | length 3.5
  Top Layer w0.254: U1.3 72.259,66.065 72.259,68.342 72.242,68.359 72.242,69.448 R1.2@72.326,69.532
NetR10_2: R10.2 U1.22 | length 19.6
  Top Layer w0.254: R10.2@56.832,81.534 56.832,81.522 55.537,80.227 55.537,77.238 58.191,74.583 58.191,70.964 61.173,67.983 62.132,67.983 62.751,67.364 U1.22
NetR11_2: R11.2 U1.21 | length 18.1
  Top Layer w0.254: R11.2 55.944,79.159 55.944,77.406 58.598,74.752 58.598,71.133 61.341,68.389 62.42,68.389 63.251,67.559 U1.21
NetR19_1: R19.1 U2.44 | length 9.9
  Top Layer w0.254: U2.44 72.76,81.585 ; 72.76,81.585 78.015,81.585 78.44,82.01 78.44,83.866 78.13,84.176 R19.1@77.749,84.176
NetU1_1: U1.1 U2.41 | length 16.2
  Top Layer w0.254: U2.41@72.061,80.085 73.823,80.085 73.898,80.01 v1(73.965,80.01) ; U1.1 73.251,67.586 v1(73.304,67.64)
  Bottom Layer w0.254: v1(73.304,67.64) 73.326,67.662 73.326,78.685 73.965,79.324 v1(73.965,80.01)
NetU1_2: U1.2 U2.40 | length 14.8
  Top Layer w0.254: U2.40@72.009,79.604 73.076,79.604 v1(73.127,79.553) ; U1.2 72.773,66.079 72.773,68.049 v1(72.796,68.072)
  Bottom Layer w0.254: v1(72.796,68.072) 72.796,79.156 73.127,79.486 v1(73.127,79.553)
NetU1_8: U1.8 U2.33 | length 11.9
  Top Layer w0.254: U2.33 68.624,73.46 70.549,71.535 70.549,68.972 69.676,68.099 69.676,67.345 69.751,67.27 U1.8
nRST: P1.3 U2.7 | length 45.5
  Top Layer w0.254: U2.7 67.132,84.894 67.132,85.752 69.6,88.219 77.581,88.219 v1(79.9,85.9)
  Bottom Layer w0.254: v1(79.9,85.9) 79.9,81.325 90.206,71.018 90.206,68.194 P1.3@95.8,62.6
REF: R12.1 R13.2 U1.20 | length 11.1
  Top Layer w0.254: R13.2 61.239,72.249 60.916,72.572 60.692,72.572 60.684,72.581 60.325,72.581 ; R12.1@61.277,73.596 61.163,73.596 60.325,72.759 60.325,72.581 ; U1.20 63.751,67.634 62.561,68.824 61.492,68.824 60.325,69.99 60.325,72.581
SH_A: C7.2 P4.3 Q1.1 Q1.2 Q1.3 Q2.0 Q2.5 Q2.6 Q2.7 Q2.8 Q3.1 Q3.2 Q3.3 Q4.0 Q4.5 Q4.6 Q4.7 Q4.8 R20.2 U1.42 | length 60.4
  Top Layer w0.254: R20.2@50.8,69.025 50.8,68.199 54.991,64.008 v1(54.991,59.69) ; v1@70.231,58.229 70.236,58.225 70.236,53.297 C7.2 77.826,52.349 Q3.1@86.677,43.497
  Bottom Layer w0.254: v1(54.991,59.69) 54.991,54.229 56.769,52.451 61.152,52.451 66.994,58.293 v1(70.231,58.293)
SH_B: C8.2 P4.2 Q5.1 Q5.2 Q5.3 Q6.0 Q6.5 Q6.6 Q6.7 Q6.8 Q7.1 Q7.2 Q7.3 Q8.0 Q8.5 Q8.6 Q8.7 Q8.8 R21.2 U1.37 | length 46.9
  Top Layer w0.254: R21.2@53.8,69 53.8,67.231 55.88,65.151 v1(55.88,59.69) ; R21.2@53.848,69.088 R21.2 53.85,69.048 R21.2@53.858,69.013 ; v1(55.95,55.25) 55.95,54.286 60.134,50.102 v1(60.134,48.895) ; v1(61.214,47.816) 61.087,47.625 61.087,46.164 61.468,45.783 62.992,45.783 64.325,44.45 Q8.0 ; U1.37 67.746,57.001 67.746,55.244 67.67,55.169 67.67,53.323 C8.2 Q7.1@68.644,43.497
  Bottom Layer w0.254: v1(55.88,59.69) 55.88,55.32 v1(55.95,55.25) ; v1(60.134,48.895) v1(61.214,47.816)
SH_C: C9.2 P4.1 Q9.1 Q9.2 Q9.3 Q10.0 Q10.5 Q10.6 Q10.7 Q10.8 Q11.1 Q11.2 Q11.3 Q12.0 Q12.5 Q12.6 Q12.7 Q12.8 R22.2 U1.32 | length 54.6
  Top Layer w0.254: Q11.1@50.609,43.497 v1(50.609,44.259) ; v1(56.769,59.69) 56.769,68.762 56.9,68.893 56.832,68.961 R22.2@56.896,69.025 ; v1(65.215,58.293) 65.251,58.257 U1.32 65.246,57.001 65.246,55.294 65.171,55.219 65.171,53.282 C9.2 ; v1(65.596,51.371) 66.103,51.88 C9.2 ; C9.2@66.103,52.387 C9.2
  Bottom Layer w0.254: v1(50.609,44.259) 51.569,43.3 59.048,43.3 65.596,49.847 v1(65.596,51.371) ; v1(56.769,59.69) 56.769,54.356 58.078,53.047 61.048,53.047 64.135,56.134 64.16,56.159 64.16,57.239 v1(65.215,58.293)
SL_A: C10.1 Q2.1 Q2.2 Q2.3 Q4.1 Q4.2 Q4.3 R4.1 U1.27 U1.40 | length 50.1
  Top Layer w0.254: C10.1 v1(61.151,55.118) ; v1(62.738,58.293) 62.751,58.28 U1.27 62.751,48.946 v1(64.516,47.18) ; U1.40 69.251,55.299 v1(69.3,55.25) ; v1(72.453,45.529) 73.952,45.529 R4.1@76.517,42.964 ; Q4.1@79.057,43.497 v1(79.057,44.259)
  Bottom Layer w0.254: v1(61.151,55.118) 62.738,56.706 v1(62.738,58.293) ; v1(64.516,47.18) 66.167,45.529 v1(72.453,45.529) ; v1(69.3,55.25) 69.3,50.125 75.166,44.259 v1(79.057,44.259)
SL_B: C11.1 Q6.1 Q6.2 Q6.3 Q8.1 Q8.2 Q8.3 R7.1 U1.29 U1.35 | length 39.7
  Top Layer w0.254: R7.1 58.547,43.154 58.547,43.37 60.452,45.276 60.452,47.816 61.722,49.085 v1(62.039,49.085) ; C11.1@60.389,53.721 60.96,54.292 v1(61.214,54.292) ; Q8.1@61.023,43.497 v1(61.023,44.259) ; v1@63.754,58.229 63.751,58.226 U1.29 63.751,51.616 v1(63.779,51.587) ; v1(66.7,55.5) 66.7,55.469 66.65,55.419 66.751,55.52 U1.35
  Bottom Layer w0.254: v1(61.023,44.259) 61.023,44.514 66.7,50.19 v1(66.7,55.5) ; v1(61.214,54.292) 63.7,56.778 v1(63.7,58.3) ; v1(62.039,49.085) 63.779,50.825 v1(63.779,51.587)
SPI1_MISO: U1.6 U2.16 | length 20.9
  Top Layer w0.254: U2.16 64.745,82.086 64.789,82.042 v1(65.557,82.042) ; v1@70.743,68.076 70.684,68.017 70.684,67.984 70.743,67.925 70.743,66.064 U1.6
  Bottom Layer w0.254: v1(65.557,82.042) 65.511,81.995 65.511,80.555 71.192,74.874 71.192,71.143 70.671,70.622 v1(70.671,68.021)
SPI1_MOSI: U1.5 U2.17 | length 20.8
  Top Layer w0.254: U2.17 64.951,81.585 65.024,81.513 65.889,81.513 65.973,81.597 v1(66.04,81.597) ; U1.5 71.251,67.853 71.2,67.904 71.2,68.517 71.399,68.717 v1(71.399,68.783)
  Bottom Layer w0.254: v1(66.04,81.597) 66.04,80.601 71.599,75.042 71.599,70.975 71.399,70.775 v1(71.399,68.783)
SPI1_NSS: U1.4 U2.14 | length 22.3
  Top Layer w0.254: U2.14 63.343,83.105 65.968,83.105 v1(66.065,83.007) ; U1.4 71.74,66.067 71.74,68.121 v1@71.755,68.135
  Bottom Layer w0.254: v1(66.065,83.007) 66.087,82.986 66.087,82.299 72.005,76.381 72.005,68.465 71.73,68.189 v1(71.73,68.123)
SPI1_SCK: U1.7 U2.15 | length 20.9
  Top Layer w0.254: U2.15 63.329,82.58 65.019,82.58 v1(65.024,82.575) ; v1(70.206,67.564) 70.206,66.101 U1.7
  Bottom Layer w0.254: v1(65.024,82.575) 65.024,80.467 70.786,74.705 70.786,71.311 70.141,70.667 70.141,67.802 70.159,67.785 70.159,67.611 v1(70.206,67.564)
SWCLK: P1.5 U2.37 | length 38
  Top Layer w0.254: U2.37 84.015,78.086 89.1,73 89.1,64.3 P1.5@95.8,57.6
SWDIO: P1.4 U2.34 | length 39.4
  Top Layer w0.254: U2.34@69.123,76.764 69.123,74.019 70.037,73.105 78.617,73.105 v1(79.858,74.346) ; U2.34 69.123,77.713
  Bottom Layer w0.254: v1(79.858,74.346) 81.356,74.346 85.336,70.366 85.336,66.373 91.539,60.17 P1.4 P1.4@95.761,60.17
SWO: P1.2 U2.39 | length 31.1
  Top Layer w0.254: U2.39 72.616,79.085 73.114,78.588 84.087,78.588 89.506,73.168 89.506,71.394 P1.2@95.7,65.2
TIM1_CH1: R18.1 U1.13 U2.29 | length 37.8
  Top Layer w0.254: U1.13 67.251,68.206 66.581,68.875 66.581,72.743 66.623,72.786 U2.29 66.623,77.927 69.087,80.391 v1(69.418,80.391) ; v1(76.022,70.815) 77.191,69.647 80.426,69.647 80.543,69.764 R18.1@80.543,69.723
  Bottom Layer w0.254: v1(69.418,80.391) 70.024,80.997 75.56,80.997 76.022,80.534 v1(76.022,70.815)
TIM1_CH1N: U1.14 U2.28 | length 11
  Top Layer w0.254: U2.28 66.123,68.758 66.764,68.117 66.764,66.07 U1.14
TIM1_CH2: R17.1 U1.15 U2.30 | length 28.2
  Top Layer w0.254: U1.15 66.251,67.825 v1@66.256,67.831 ; U2.30 67.124,74.828 67.085,74.79 67.085,73.596 67.234,73.447 v1(67.234,73.381) ; v1(78.003,70.612) 78.003,70.714 78.791,71.501 R17.1@80.395,71.501
  Bottom Layer w0.254: v1(66.2,67.85) 67.643,66.406 73.722,66.406 77.927,70.612 v1(78.003,70.612) ; v1@66.2,67.861 66.2,72.347 v1(67.234,73.381)
TIM1_CH2N: U1.16 U2.27 | length 10.8
  Top Layer w0.254: U2.27 65.623,71.416 65.657,71.382 65.657,67.644 65.751,67.551 U1.16
TIM1_CH3: R16.1 U1.17 U2.31 | length 32.2
  Top Layer w0.254: v1(65.126,68.275) 65.251,68.15 U1.17 ; v1(67.615,74.422) 67.619,74.426 U2.31@67.619,76.769 ; v1(79.451,72.542) 79.451,72.755 79.873,73.177 80.496,73.177 80.548,73.229 R16.1
  Bottom Layer w0.254: v1(67.615,74.422) 67.568,74.375 67.479,74.375 65.126,72.021 v1(65.126,68.275) 65.67,67.73 65.67,67.631 67.301,66 74.255,66 79.451,71.196 v1(79.451,72.542)
TIM1_CH3N: U1.18 U2.26 | length 11
  Top Layer w0.254: U1.18 64.751,67.902 64.596,68.056 64.596,71.776 65.123,72.303 U2.26
UART1_Rx: P2.3 U2.43 | length 26.7
  Top Layer w0.254: U2.43 71.44,81.102 v1(89.027,81.102)
  Bottom Layer w0.254: v1(89.027,81.102) 94.669,75.46 95.711,75.46 P2.3@95.733,75.438
UART1_Tx: P2.2 U2.42 | length 25.4
  Top Layer w0.254: U2.42 71.428,80.59 87.405,80.59 89.996,78 95.558,78 P2.2@95.682,77.876
VBUS: C5.1 C6.1 C25.1 P3.2 Q1.0 Q1.5 Q1.6 Q1.7 Q1.8 Q3.0 Q3.5 Q3.6 Q3.7 Q3.8 Q5.0 Q5.5 Q5.6 Q5.7 Q5.8 Q7.0 Q7.5 Q7.6 Q7.7 Q7.8 Q9.0 Q9.5 Q9.6 Q9.7 Q9.8 Q11.0 Q11.5 Q11.6 Q11.7 Q11.8 U1.25 U3.3 | length 56.1
  Top Layer w0.3: C25.1 45,84.9 49.6,84.9 50.6,83.9 U3.3
  Top Layer w0.762: P3.2@40.767,57.785 40.932,57.62 C6.1 59.474,57.62 C5.1@59.563,57.531 ; 46.3,57.7 47.836,59.236 47.836,77.845 50.6,80.609 U3.3 ; C5.1 60.744,57.62 61.214,57.15
  other v2: 57.15,33.528 57.912,33.528 58.674,33.528 59.436,33.528 75.184,33.528 75.946,33.528 76.708,33.528 77.47,33.528 93.218,33.528 93.98,33.528 94.742,33.528 95.504,33.528 57.15,34.29 57.912,34.29 58.674,34.29 59.436,34.29 75.184,34.29 75.946,34.29 76.708,34.29 77.47,34.29 93.218,34.29 93.98,34.29 94.742,34.29 95.504,34.29 57.15,35.052 57.912,35.052 58.674,35.052 75.184,35.052 75.946,35.052 76.708,35.052 93.218,35.052 93.98,35.052 94.742,35.052 57.15,35.814 57.912,35.814 75.184,35.814 75.946,35.814 93.218,35.814 93.98,35.814 57.15,36.576 75.184,36.576 93.218,36.576
pads on no net: M1. M2. M3. M4. U2.2 U2.3 U2.4 U2.5 U2.6 U2.10 U2.21 U2.25 U2.38 U2.45 U2.46

## Polygon pours and split planes (outlines as drawn)
GND on Top Layer "Top Layer-GND 1" (solid, pour order 34): 83.5,50.8 85,52.3 85,63 83.5,64.5 39.1,64.5 37,62.4 37,50.8 37,36 39.5,33.5 43.9,33.5 43.9,48.9 45.8,50.8
3v3 on Top Layer "Top Layer-3v3" (solid, pour order 32): 37,86 37,65 83.75,65 85.5,63.25 85.5,55 86.75,53.75 97,53.75 97,86 ccw(c92,86) 92,91 42,91 ccw(c41.999,86.001)
GND on Top Layer "Top Layer-GND 2" (solid, pour order 38): 77.65,48.25 77.4,48.5 75.5,48.5 75.25,48.25 75.25,45.75 75.5,45.5 77.4,45.5 77.65,45.75
GND on Top Layer "Top Layer-GND 3" (solid, pour order 36): 59.45,47.8 58.75,48.5 57,48.5 56.7,48.2 56.7,46.3 57.5,45.5 59.45,45.5
VBUS on Top Layer "Top Layer-VBUS" (solid, pour order 24): 88.138,43.688 92.71,43.688 92.71,37.846 96.012,34.544 96.012,33.02 88.646,33.02 88.138,33.528
VBUS on Top Layer "Top Layer-VBUS" (solid, pour order 20): 70.104,43.688 74.676,43.688 74.676,37.846 77.978,34.544 77.978,33.02 70.612,33.02 70.104,33.528
VBUS on Top Layer "Top Layer-VBUS 1" (solid, pour order 18): 52.07,43.688 56.642,43.688 56.642,37.846 59.944,34.544 59.944,33.02 52.578,33.02 52.07,33.528
SH_C on Top Layer "SH_B" (solid, pour order 10): 44.386,43.688 51.244,43.688 51.244,33.084 54.8,29.527 60.96,29.527 62.865,27.622 62.865,26.162 62.23,25.527 52.514,25.527 44.386,33.655
SH_A on Top Layer "SH_B" (solid, pour order 8): 80.454,43.688 87.312,43.688 87.312,33.655 79.057,25.4 70.721,25.4 69.85,26.166 69.85,27.622 71.755,29.527 76.327,29.527 80.454,33.655
no net on Top Layer "Top Layer-No Net" (solid, pour order 6): 64.389,38.672
SH_B on Top Layer "SH_B" (solid, pour order 4): 64.77,26.289 65.524,25.535 67.127,25.535 69.208,27.616 69.278,43.688 62.42,43.688 62.42,30.924 64.77,28.575
SL_A on Top Layer "SL_A" (solid, pour order 2): 75.438,43.815 75.438,37.846 78.359,34.925 79.692,34.925 79.692,43.815
SL_B on Top Layer "SL_B" (solid, pour order 0): 57.404,43.815 57.404,37.846 60.325,34.925 61.658,34.925 61.658,43.815
GND on Bottom Layer "Bottom Layer-No Net" (solid, pour order 14): 37,64 37,86 cw(c42,86) 42,91 92,91 cw(c92,86.001) 97,86 97,54.5 94.5,52 79.2,52 77.7,50.5 77.7,47 77.4,46.7 75.5,46.7 75.2,47 75.2,50.5 73.7,52 56.2,52 56.2,51.1 59,48.3 59,47 58.6,46.6 55.4,46.6 50,52 46,56 46,59 44,61 39,61 37,63
3v3 on Bottom Layer "Bottom Layer-3v3" (solid, pour order 12): 57.5,88.5 57.5,76.5 59.5,76.5 59.5,88.5
VBUS on Bottom Layer "Bottom Layer-VBUS" (solid, pour order 22): 44,45 44,58 42.5,59.5 39.5,59.5 38,58 38,35.083 42.021,31 95,31 96,32 96,34.51 91.51,39 50,39
no net on Bottom Layer "Bottom Layer-No Net 1" (solid, pour order 16): 50.546,79.756

## Other copper
Top Layer:
  rectangle net VBUS: 60.96,56.388 61.722,57.658

## Silkscreen, mask and mechanical layers (free items; w line width, h text height)
Top Overlay:
  text "3.3V" at 83.85,81.9 h1
  text "3v3" at 90.75,80.2 h1
  text "Rx" at 91.75,77.7 h1
  text "Tx" at 91.75,75.2 h1
  text "GND" at 90.75,72.45 h1
  text "3v3" at 90.85,67.5 h1
  text "SWO" at 90.85,65 h1
  text "nRST" at 89.85,62.4 h1
  text "SWDIO" at 89.05,59.8 h1
  text "SWCLK" at 88.85,57.3 h1
  text "GND" at 90.85,54.7 h1
Mechanical 1:
  the board outline again, w0.5